# Altium PCB PCB_RX.PcbDoc
Units mm, origin at the board's own origin, x right, y up, seen from the top; angles counter-clockwise.
Board outline 85 x 54.6 mm, 2 copper layers (Top Layer, Bottom Layer); 111 components, 60 nets, 347 pads, 141 vias.
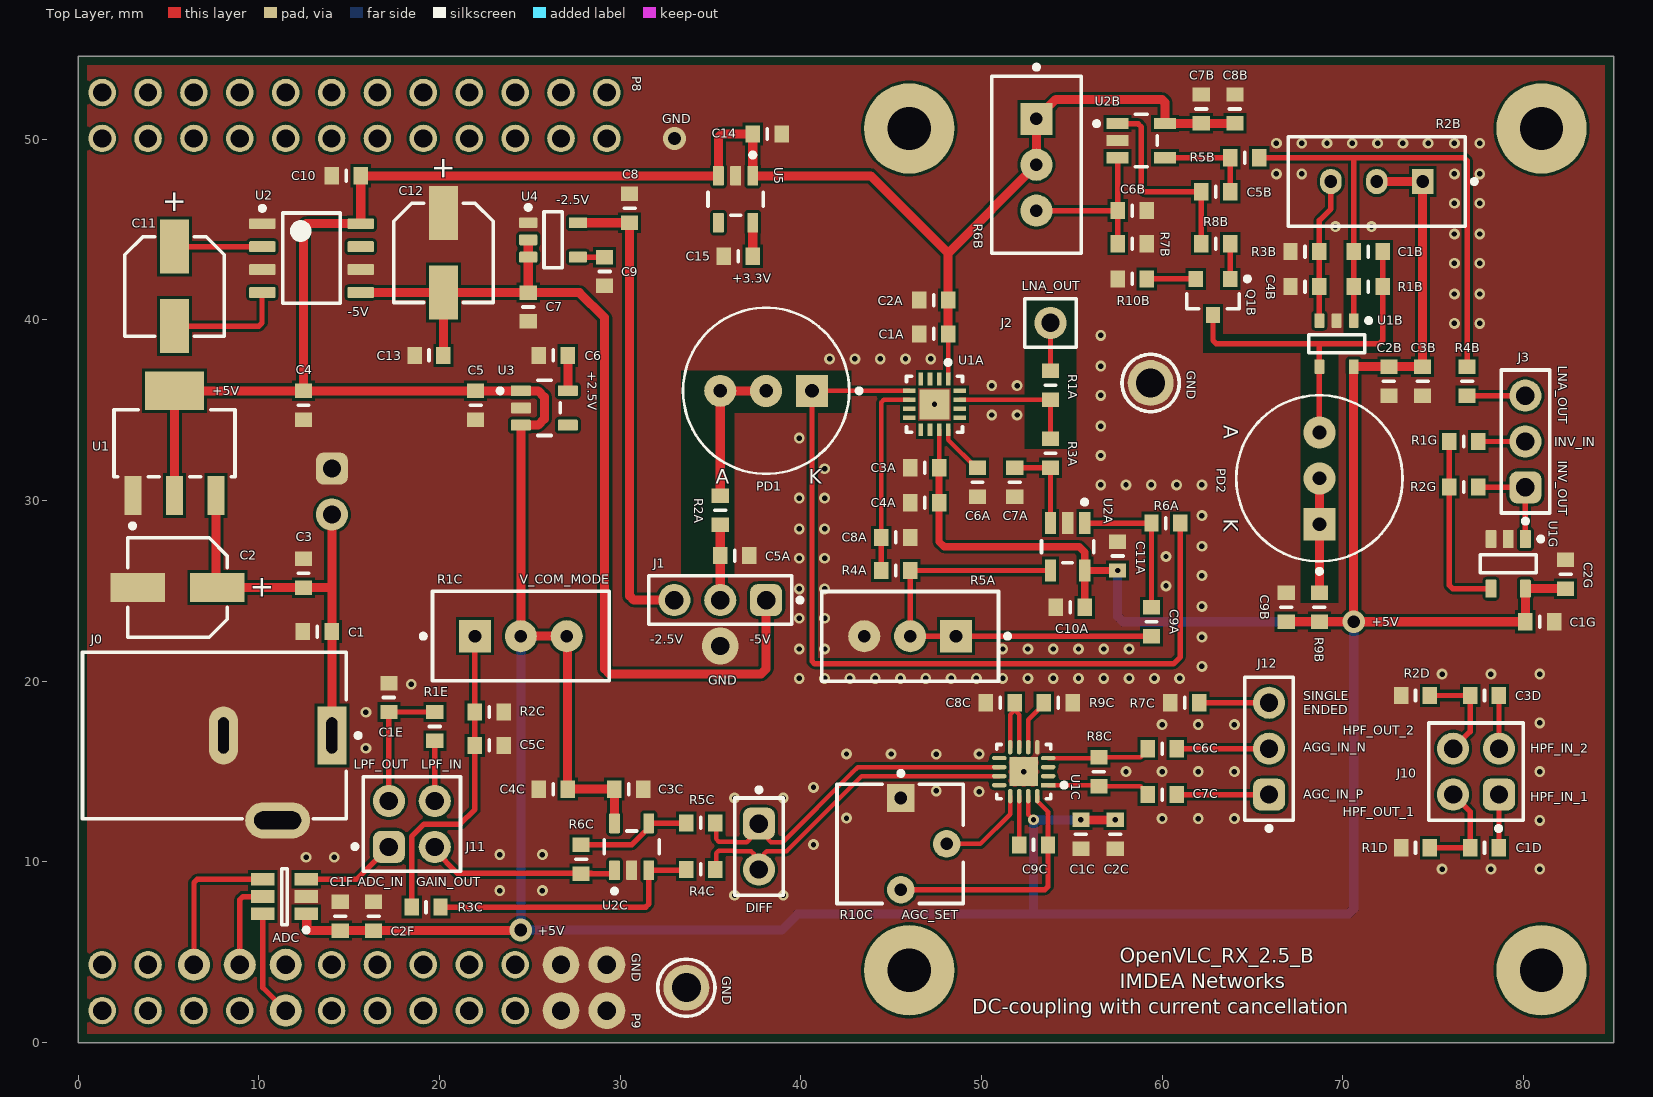
[diagram p0: Top Layer view]
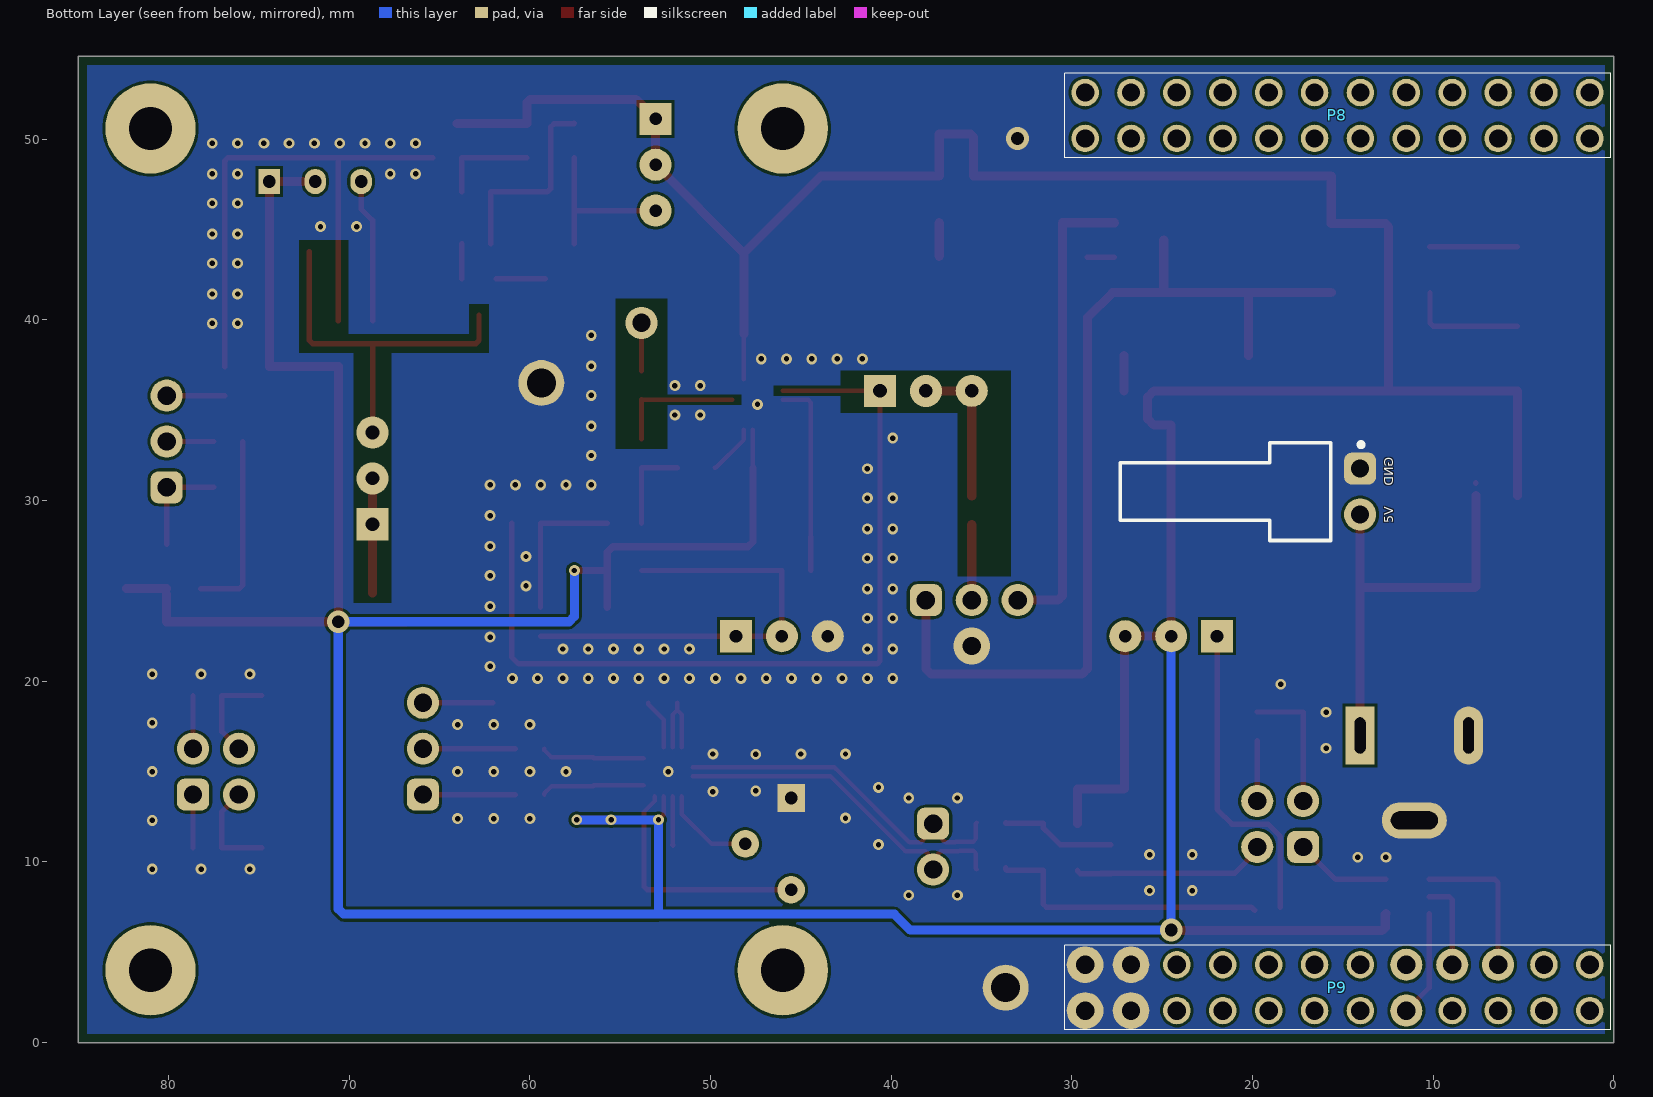
[diagram p1: Bottom Layer view, seen from below]

## Layer stack, top to bottom
Top Solder: solder mask 0.0102, Solder Resist, Dk 3.5
Top Layer: signal copper 0.0356
Dielectric1: dielectric 0.32, FR-4, Dk 4.8
Bottom Layer: signal copper 0.0356
Bottom Solder: solder mask 0.0102, Solder Resist, Dk 3.5

## Board outline
0,0 85,0 85,54.6 0,54.6

## Design rules (kind name [scope] priority, off if disabled: settings)
Clearance Clearance_1 [(InNet('GND') AND InComponent('DC-DC'))] p1: gap=0.5 ignorepadtopadclearanceinfootprint=FALSE except(0: Arc-Hole Track-Hole SMDPad-Hole THPad-Hole Via-Hole Fill-Hole Poly-Hole Region-Hole Text-Hole)
Clearance [All] p2: gap=0.15 ignorepadtopadclearanceinfootprint=FALSE except(0: Arc-Hole Track-Hole SMDPad-Hole THPad-Hole Via-Hole Fill-Hole Poly-Hole Region-Hole Text-Hole)
DiffPairsRouting [All] p1: maxlimit=0.3 minlimit=0.25 mostfreqgap=0.3 toplayer_prefgap=0.25 toplayer_minwidth=0.15 toplayer_maxwidth=0.381 toplayer_prefwidth=0.381 bottomlayer_minwidth=0.15 bottomlayer_maxwidth=0.381 bottomlayer_prefwidth=0.381 maxuncoupledlength=12.7
HoleSize [All] p1: absolutevalues=TRUE maxlimit=2.54 minlimit=0.25 maxpercent=80.000 minpercent=20.000
MinimumSolderMaskSliver [All] p1: minsoldermaskwidth=0.15
PlaneConnect [All] p1: planeconnectstyle=Direct reliefexpansion=0.508 reliefentries=4 reliefconductorwidth=0.254 reliefairgap=0.254
PolygonConnect PolygonConnect_1 [IsVia & InNet('GND')] p1: connectstyle=Direct reliefconductorwidth=0.254 reliefentries=4 polygonreliefangle="90 Angle" airgapwidth=0
PolygonConnect [All] p2: connectstyle=Direct reliefconductorwidth=0.254 reliefentries=4 polygonreliefangle="90 Angle" airgapwidth=0.254
RoutingVias [All] p1: holewidth=0.711 width=1.27 viastyle="Through Hole" minholewidth=25 minwidth=0.55 maxholewidth=0.711 maxwidth=1.27
SMDNeckDown [All] p1: percent=80.000
SilkToSilkClearance [All] p1: silktosilkclearance=0.15
SilkToSolderMaskClearance [IsPad] p1: minsilkscreentomaskgap=0.15 clearancetoexposedcopper=TRUE
SolderMaskExpansion [All] p1: expansion=0.102 istentingtop=FALSE
SupplyNets "Schematic Supply Nets_2" [InNet('+3.3V')] p1: voltage=0.000
SupplyNets "Schematic Supply Nets_6" [InNet('-5V')] p2: voltage=0.000
SupplyNets "Schematic Supply Nets_5" [InNet('-2.5V')] p3: voltage=0.000
SupplyNets "Schematic Supply Nets_4" [InNet('+2.5V')] p4: voltage=0.000
SupplyNets "Schematic Supply Nets_3" [InNet('+5V')] p5: voltage=0.000
SupplyNets "Schematic Supply Nets_1" [InNet('VCC')] p6: voltage=0.000
SupplyNets "Schematic Supply Nets" [InNet('GND')] p7: voltage=0.000
Width [All] p1: maxlimit=1 minlimit=0.15 preferedwidth=0.3 minimp=50.000000 maximp=50.000000 favimp=50.000000
24 further rules are at their usual default settings.

## Classes and differential pairs
differential pair OUT2: +OUT2_P -OUT2_N

## Components (designator, comment, footprint, x,y, rotation, side; value= is the part's Value field where it differs from the comment)
5V "61900211021" 61900211021 -1248.51,-1239.5 r270 bottom
ADC "ADS7886SBDBVR" TI-DBV6_M 11.42,8.083 r180 top
C1 "Cap" RESC1608X55N 13.24,22.752 r180 top value=10uF
C1A "Cap" RESC1608X55N 47.35,39.228 r180 top value=100nF
C1B "Cap" RESC1608X55N 71.405,43.782 r180 top value=0.2pF
C1C "Cap" RESC1608X55N 55.5,11.533 r270 top value=100nF
C1D "Cap" RESC1608X55N 77.844,10.785 r180 top value=120nF
C1E "Cap" RESC1608X55N 17.198,19.1 r90 top value=620pF
C1F "Cap" RESC1608X55N 14.509,7.003 r90 top value=100nF
C1G "Cap" RESC1608X55N 80.906,23.295 r0 top value=100nF
C2 "47uF" WCAP-PSLP_D5H5.5 5.5,25.187 r0 top
C2A "Cap" RESC1608X55N 47.35,41.101 r180 top value=2.2uF
C2B "Cap" RESC1608X55N 72.548,36.614 r270 top value=100nF
C2C "Cap" RESC1608X55N 57.4,11.533 r270 top value=2.2uF
C2F "Cap" RESC1608X55N 16.354,7.003 r90 top value=2.2uF
C2G "Cap" RESC1608X55N 82.332,25.925 r90 top value=2.2uF
C3 "Cap" RESC1608X55N 12.47,25.987 r270 top value=2.2uF
C3A "Cap" RESC1608X55N 46.85,31.819 r180 top value=100nF
C3B "Cap" RESC1608X55N 74.418,36.614 r270 top value=2.2uF
C3C "Cap" RESC1608X55N 30.48,14.026 r0 top value=100nF
C3D "Cap" RESC1608X55N 77.844,19.213 r180 top value=120nF
C4 "Cap" RESC1608X55N 12.47,35.279 r90 top value=10uF
C4A "Cap" RESC1608X55N 46.85,29.883 r180 top value=2.2uF
C4B "Cap" RESC1608X55N 67.905,41.845 r0 top value=4.7uF
C4C "Cap" RESC1608X55N 26.305,14.026 r180 top value=2.2uF
C5 "Cap" RESC1608X55N 22,35.279 r90 top value=2.2uF
C5A "Cap" RESC1608X55N 36.34,26.956 r180 top value=100nF
C5B "Cap" RESC1608X55N 62.965,47.096 r0 top value=2.2uF
C5C "Cap" RESC1608X55N 22.76,16.448 r180 top value=2.2uF
C6 "Cap" RESC1608X55N 26.305,38.041 r0 top value=10uF
C6A "Cap" RESC1608X55N 49.778,31.019 r270 top value=2.2uF
C6B "Cap" RESC1608X55N 58.338,46.052 r180 top value=4.7uF
C6C "Cap" RESC1608X55N 60,16.269 r180 top value=120nF
C7 "Cap" RESC1608X55N 24.911,40.719 r90 top value=2.2uF
C7A "Cap" RESC1608X55N 51.839,31.019 r270 top value=220pF
C7B "Cap" RESC1608X55N 62.165,51.68 r90 top value=100nF
C7C "Cap" RESC1608X55N 60,13.729 r180 top value=120nF
C8 "Cap" RESC1608X55N 30.52,46.182 r270 top value=10uF
C8A "Cap" RESC1608X55N 45.25,27.965 r180 top value=100nF
C8B "Cap" RESC1608X55N 64.027,51.68 r90 top value=2.2uF
C8C "Cap" RESC1608X55N 51.039,18.809 r0 top value=2.2uF
C9 "Cap" RESC1608X55N 29.141,42.682 r90 top value=100nF
C9A "Cap" RESC1608X55N 59.41,23.295 r270 top value=220pF
C9B "Cap" RESC1608X55N 66.866,24.095 r270 top value=100nF
C9C "Cap" RESC1608X55N 52.882,10.939 r0 top value=2.2uF
C10 "Cap" RESC1608X55N 14.84,47.982 r0 top value=2.2uF
C10A "Cap" RESC1608X55N 54.919,24.095 r180 top value=100nF
C11 "47uF" WCAP-PSLP_D5H5.5 5.332,41.859 r90 top
C11A "Cap" RESC1608X55N 57.538,26.933 r90 top value=2.2uF
C12 "47uF" WCAP-PSLP_D5H5.5 20.217,43.719 r90 top
C13 "Cap" RESC1608X55N 19.417,38.041 r0 top value=10uF
C14 "GRM188R6YA475KE15D" RESC1608X55N 38.139,50.294 r180 top value=2.2uF
C15 "GRM188R6YA106MA73D" RESC1608X55N 36.539,43.527 r0 top value=10uF
DIFF "61300211121" 61300211121 37.679,10.849 r270 top
GND "5011" KSTN-5011_V 59.362,36.511 r270 top
GND "5011" KSTN-5011_V 33.662,3.041 r270 top
J0 "PJ-102A" FP-PJ-102A-MFG 7.54,17 r90 top
J1 "61300311121" 61300311121 35.54,24.494 r180 top
J2 "61300111121" 61300111121 53.819,39.837 r0 top
J3 "61300311121" 61300311121 80.106,33.272 r90 top
J10 "61300421121" 61300421121 77.374,14.999 r90 top
J11 "61300421121" 61300421121 18.468,12.1 r0 top
J12 "61300311121" 61300311121 65.918,16.269 r90 top
P8 "61302421121" BBB_CAPE_NO_HEADER_R_24#1 57.204,50.049 r0 bottom
P9 "61302421121" BBB_CAPE_NO_HEADER_R_24#2 57.205,1.771 r0 bottom
PD1 "BPW21R" FP-6_511-5002_01-4-MFG 38.08,36.079 r0 top
PD2 "BPW21R" FP-6_511-5002_01-4-MFG 68.705,31.233 r270 top
Q1B "NESG340033" ONSC-SOT-23-3-318-08_V 62.815,41.274 r270 top
R1A "Res1" RESC1608X55N 53.819,36.379 r270 top value=130
R1B "Res1" RESC1608X55N 71.405,41.845 r0 top value=390k
R1C "500" FP-3296W-MFG#1 24.5,22.5 r270 top
R1D "Res1" RESC1608X55N 74.024,10.785 r180 top value=130
R1E "Res1" RESC1608X55N 19.738,17.5 r270 top value=130
R1G "Res1" RESC1608X55N 76.696,33.272 r180 top value=130
R2A "Res1" RESC1608X55N 35.54,29.465 r270 top value=2k
R2B "20k" FP-3296W-MFG#2 71.878,47.658 r90 top
R2C "Res1" RESC1608X55N 22.76,18.3 r0 top value=470
R2D "Res1" RESC1608X55N 74.024,19.213 r180 top value=130
R2G "Res1" RESC1608X55N 76.696,30.755 r0 top value=130
R3A "Res1" RESC1608X55N 53.819,32.619 r270 top value=68.1
R3B "Res1" RESC1608X55N 67.905,43.782 r180 top value=470
R3C "Res1" RESC1608X55N 19.254,7.5 r180 top value=130
R4A "Res1" RESC1608X55N 45.25,26.133 r180 top value=34k
R4B "Res1" RESC1608X55N 76.881,36.614 r90 top value=130
R4C "Res1" RESC1608X55N 34.462,9.587 r0 top value=130
R5A "100k" FP-3296W-MFG#1 46.05,22.49 r90 top
R5B "Res1" RESC1608X55N 64.565,48.98 r180 top value=1M
R5C "Res1" RESC1608X55N 34.462,12.163 r0 top value=130
R6A "Res1" RESC1608X55N 60.21,28.753 r0 top value=20k
R6B "20k" FP-3296W-MFG#1 53.045,48.592 r180 top
R6C "Res1" RESC1608X55N 27.838,10.155 r90 top value=130
R7B "Res1" RESC1608X55N 58.338,44.223 r0 top value=470
R7C "Res1" RESC1608X55N 61.247,18.809 r180 top value=130
R8B "Res1" RESC1608X55N 62.965,44.223 r180 top value=100
R8C "Res1" RESC1608X55N 56.5,14.999 r270 top value=130
R9B "Res1" RESC1608X55N 68.705,24.095 r90 top value=2k
R9C "Res1" RESC1608X55N 54.251,18.809 r180 top value=10k
R10B "Res1" RESC1608X55N 58.338,42.274 r180 top value=100
R10C "10k" BOUR-3362P 45.5,11 r270 top
U1 "TLV76150DCYR" FP-DCY0004A-MFG 5.332,33.179 r90 top
U1A "LTC6560IUD#PBF" FP-UD-16-05-08-1700-MFG 47.4,35.329 r270 top
U1B "LMH6629MFE/NOPB" DBV0005A_L 69.655,38.689 r270 top
U1C "AD8338ACPZ-R7" FP-CP-16-22-IPC_C 52.339,14.999 r180 top
U1G "OPA820IDBVR" DBV0005A_N 79.156,26.5 r270 top
U2 "LM2663M/NOPB" D0008A_N 12.915,43.424 r0 top
U2A "LT6015IS5#TRMPBF" FP-S5-5-05-08-1635-MFG 54.769,27.443 r270 top
U2B "LT6015IS5#TRMPBF" FP-S5-5-05-08-1635-MFG 58.848,49.93 r0 top
U2C "OPA863ADBVR" FP-DBV0005A-MFG 30.635,10.837 r90 top
U3 "TPS7A2425DBVR" FP-DBV0005A-MFG 25.805,35.129 r0 top
U4 "TPS72325DBVR" DBV0005A_N 26.286,44.432 r0 top
U5 "TPS7A2433DBVR" FP-DBV0005A-MFG 36.389,46.682 r270 top

## Footprints (in the part's own frame and the unit in brackets; to place one, negate y for a bottom-side part, rotate by r counter-clockwise, add the part's x,y. Pads: shape width x height; smd on the part's side, far side on the other; paste and mask are expansions set on the pad)
61300111121 [mil] "Pin Header, pitch 2.54 mm, THT, Vertical, single row, 1p"
  round 70 hole 40: 1(0,0)
  silkscreen extent -56,-53 56,53, body extent -50,-50 50,50, height 337
61300211121 [mil] "Pin Header, pitch 2.54 mm, THT, Vertical, single row, 2p"
  rrect50% 70x70 hole 40: 1(-50,0)
  round 70 hole 40: 2(50,0)
  silkscreen extent -129,-53 106,53, body extent -100,-50 100,50, height 337
61300311121 [mil] "Pin Header, pitch 2.54 mm, THT, Vertical, single row, 3p"
  rrect50% 70x70 hole 40: 1(-100,0)
  round 70 hole 40: 2(0,0) 3(100,0)
  silkscreen extent -179,-53 156,53, body extent -150,-50 150,50, height 337
61300421121 [mil] "Pin Header, pitch 2.54 mm, THT, Vertical, dual row, 4p"
  rrect50% 70x70 hole 40: 1(-50,-50)
  round 70 hole 40: 2(-50,50) 3(50,-50) 4(50,50)
  silkscreen extent -129,-103 106,103, body extent -100,-100 100,100, height 338
61900211021 [mm] "2.54mm Male Left Angled Header Bottom Locking, 2p"
  rrect50% 1.778x1.778 hole 1: 1(-1271.27,-1262.55)
  round 1.778 hole 1: 2(-1268.73,-1262.55)
  silkscreen extent -1272.72,-1275.82 -1267.29,-1262.38, body extent -1272.54,-1275.75 -1267.46,-1262.23, height 5.83
BBB_CAPE_NO_HEADER_R_24#1 [mil] "46-pin male header for BeagleBone Black P8,P9"
  round 60 hole 40: 23(-1100,0) 24(-1100,-100) 25(-1200,0) 26(-1200,-100) 27(-1300,0) 28(-1300,-100) 29(-1400,0) 30(-1400,-100) 31(-1500,0) 32(-1500,-100) 33(-1600,0) 34(-1600,-100) 35(-1700,0) 36(-1700,-100) 37(-1800,0) 38(-1800,-100) 39(-1900,0) 40(-1900,-100) 41(-2000,0) 42(-2000,-100) 43(-2100,0) 44(-2100,-100) 45(-2200,0) 46(-2200,-100)
  silkscreen extent -2246,-142 -1056,42
BBB_CAPE_NO_HEADER_R_24#2 [mil] "46-pin male header for BeagleBone Black P8,P9"
  round 80 hole 40: 23(-1100,0) 24(-1100,-100) 25(-1200,0) 26(-1200,-100)
  round 60 hole 40: 27(-1300,0) 28(-1300,-100) 29(-1400,0) 30(-1400,-100) 31(-1500,0) 32(-1500,-100) 33(-1600,0) 34(-1600,-100) 35(-1700,0) 36(-1700,-100) 39(-1900,0) 41(-2000,0) 43(-2100,0) 44(-2100,-100) 45(-2200,0) 46(-2200,-100)
  round 70 hole 40: 37(-1800,0) 38(-1800,-100) 40(-1900,-100) 42(-2000,-100)
  silkscreen extent -2246,-142 -1056,42
BOUR-3362P [mm] "THD, 3-Leads, Body 6.6x6.99mm, Pitch 2.54mm"
  rect 1.524x1.524 hole 0.7 paste-2539.97 mask+0: 1(-2.54,0.035)
  round 1.524 hole 0.7 paste-2539.97 mask+0: 2(0,2.575) 3(2.54,0.035)
  silkscreen extent -4.02,-3.49 3.3,3.5, body extent -3.3,-3.49 3.3,3.49, height 4.95
D0008A_N [mm] "SOIC, 8-Leads, Body 5x4mm, Pitch 1.27mm, IPC Medium Density"
  rrect17% 1.45x0.6 smd: 1(-2.725,1.905) 2(-2.725,0.635) 3(-2.725,-0.635) 4(-2.725,-1.905) 5(2.725,-1.905) 6(2.725,-0.635) 7(2.725,0.635) 8(2.725,1.905)
  silkscreen extent -2.85,-2.5 1.6,2.88, body extent -3,-2.45 3,2.45, height 1.63
DBV0005A_L [mm] "SOT23, 5-Leads, Body 3.05x1.75mm, Pitch 0.95mm, IPC High Density"
  rrect18% 0.8x0.55 smd: 1(-1.275,0.95) 2(-1.275,0) 3(-1.275,-0.95) 4(1.275,-0.95) 5(1.275,0.95)
  silkscreen extent -1.4,-1.55 0.5,1.9, body extent -1.42,-1.46 1.42,1.46, height 1.08
DBV0005A_N [mm] "SOT23, 5-Leads, Body 3.05x1.75mm, Pitch 0.95mm, IPC Medium Density"
  rrect17% 1x0.6 smd: 1(-1.375,0.95) 2(-1.375,0) 3(-1.375,-0.95) 4(1.375,-0.95) 5(1.375,0.95)
  silkscreen extent -1.5,-1.55 0.5,1.93, body extent -1.42,-1.46 1.42,1.46, height 1.08
FP-6_511-5002_01-4-MFG [mil]
  rect 70x70 hole 30 paste-99999 mask+0: 1(100,0)
  round 70 hole 30 paste-99999 mask+0: 2(-100,0)
  silkscreen extent -181,-181 208,181, body extent -185,-185 185,185, height 10
FP-3296W-MFG#1 [mm]
  rect 1.778x1.778 hole 0.7 paste-2539.97 mask+0: 1(0.005,-2.54)
  round 1.778 hole 0.7 paste-2539.97 mask+0: 2(0.005,0) 3(0.005,2.54)
  silkscreen extent -2.48,-5.52 2.48,4.89, body extent -2.58,-4.99 2.58,4.99, height 0.25
FP-3296W-MFG#2 [mm]
  rect 1.397x1.2 hole 0.7 paste-2539.97 mask+0: 1(0.005,-2.54)
  oval 1.397x1.2 hole 0.7 paste-2539.97 mask+0: 2(0.005,0) 3(0.005,2.54)
  silkscreen extent -2.48,-5.53 2.48,4.89, body extent -2.58,-4.99 2.58,4.99, height 0.25
FP-CP-16-22-IPC_C [mm]
  rect 0.806x0.239 smd paste+0 mask+0: 1(-1.353,0.75)
  rrect100% 0.806x0.239 smd paste+0 mask+0: 2(-1.353,0.25) 3(-1.353,-0.25) 4(-1.353,-0.75) 9(1.353,-0.75) 10(1.353,-0.25) 11(1.353,0.25) 12(1.353,0.75)
  rrect100% 0.239x0.806 smd paste+0 mask+0: 5(-0.75,-1.353) 6(-0.25,-1.353) 7(0.25,-1.353) 8(0.75,-1.353) 13(0.75,1.353) 14(0.25,1.353) 15(-0.25,1.353) 16(-0.75,1.353)
  rect 1.6x1.6 smd paste-1000 mask+0: 17(0,0)
  silkscreen extent -2.36,-1.5 1.5,1.5, body extent -1.86,-1.86 1.86,1.86, height 0.25
FP-DBV0005A-MFG [mm]
  rrect17% 1.1x0.6 smd paste+0 mask+0: 1(-1.3,0.95) 2(-1.3,0) 3(-1.3,-0.95) 4(1.3,-0.95) 5(1.3,0.95)
  silkscreen extent -2.57,-1.53 0.87,1.53, body extent -1.95,-1.78 1.95,1.78, height 0.25
FP-DCY0004A-MFG [mm]
  rect 2.15x0.95 smd paste+0 mask+0: 1(-2.9,2.3) 2(-2.9,0) 3(-2.9,-2.3)
  rect 2.15x3.25 smd paste+0 mask+0: 4(2.9,0)
  silkscreen extent -4.7,-3.35 1.85,3.35, body extent -4.08,-3.45 4.08,3.45, height 0.25
FP-PJ-102A-MFG [mm]
  rect 3.2x1.6 hole 0.6 slot 2 at 0 deg paste-2539.97 mask+0: 1(0,-6.5)
  rrect100% 3.2x1.6 hole 0.6 slot 2 at 0 deg paste-2539.97 mask+0: 2(0,-0.5)
  rrect100% 2x3.6 hole 2.6 slot 1 at 0 deg paste-2539.97 mask+0: 3(-4.7,-3.5)
  silkscreen extent -4.6,-8.08 4.6,7.3, body extent -5.6,-7.4 4.7,7.4, height 0.25
FP-S5-5-05-08-1635-MFG [mm]
  rect 1.22x0.62 smd paste+0 mask+0: 1(-1.31,0.95) 2(-1.31,0) 3(-1.31,-0.95) 4(1.31,-0.95) 5(1.31,0.95)
  silkscreen extent -2.6,-1.45 0.87,1.45, body extent -2.02,-1.68 2.02,1.68, height 0.25
FP-UD-16-05-08-1700-MFG [mm]
  rect 0.7x0.25 smd paste+0 mask+0: 1(-1.4,0.75) 2(-1.4,0.25) 3(-1.4,-0.25) 4(-1.4,-0.75) 9(1.4,-0.75) 10(1.4,-0.25) 11(1.4,0.25) 12(1.4,0.75)
  rect 0.25x0.7 smd paste+0 mask+0: 5(-0.75,-1.4) 6(-0.25,-1.4) 7(0.25,-1.4) 8(0.75,-1.4) 13(0.75,1.4) 14(0.25,1.4) 15(-0.25,1.4) 16(-0.75,1.4)
  rect 1.65x1.65 smd paste+0 mask+0: 17(0,0)
  silkscreen extent -2.45,-1.55 1.55,1.55, body extent -1.85,-1.85 1.85,1.85, height 0.25
KSTN-5011_V [mm] "Test Point, Dia 3.17mm"
  round 2.54 hole 1.6: 1(0,0)
  silkscreen extent -1.58,-1.59 1.58,1.59, body extent -1.59,-1.59 1.59,1.59, height 8.13
ONSC-SOT-23-3-318-08_V [mm] "SOT23, 3-Leads, Body 2.92x1.3mm, Pitch 0.95mm"
  rect 0.9x0.8 smd: 1(-1,0.95) 2(-1,-0.95) 3(1,0)
  silkscreen extent -1.12,-1.46 0.65,2.03, body extent -0.65,-1.46 0.65,1.46, height 1.11
RESC1608X55N [mm]
  rect 0.8x0.95 smd: 1(-0.8,0) 2(0.8,0)
  silkscreen extent 0,-0.3 0,0.3
TI-DBV6_M [mm] "SOT23, 6-Leads, Body 2.9x1.6mm, Pitch 0.95mm, IPC Low Density"
  rect 1.3x0.7 smd: 1(-1.2,0.95) 2(-1.2,0) 3(-1.2,-0.95) 4(1.2,-0.95) 5(1.2,0) 6(1.2,0.95)
  silkscreen extent -1.33,-1.55 0.15,1.97, body extent -0.87,-1.52 0.87,1.53, height 1.45
WCAP-PSLP_D5H5.5 [mm] "Aluminum Polymer Capacitors, body diameter 5mm"
  rect 3x1.6 smd: 1(2.2,0) 2(-2.2,0)
  silkscreen extent -2.75,-2.75 2.75,2.75, body extent -3,-2.65 3,2.65, height 5.5

## Part data
5V: library part CMP-1502-00592-2, Color=Beige, Contact Resistance=20mΩ, Current Rating=3A, Flammability Rating="UL94 V-0", Insulation Resistance=1GΩ, Max Operating Temperature=105°C, Min Operating Temperature=-40°C, Operating Supply Voltage=250V, Connector Type="Male Pin", Contact Gender=Male, Contact Material=Copper, Contact Mating Length=7.62mm, Contact Plating=Tin, Fastening Type=Friction, Gender=Male, Height=3.2mm, Housing Material=Nylon, Insulation=Insulated, Lead Pitch=2.54mm, Length=5.08mm, Mount="Through Hole", NexarPartId=18818217, Number of Contacts=2, Number of Pins=2, Number of Positions=2, Number of Rows=1, Packaging=Bulk, Pitch=2.54mm, REACH SVHC=Unknown, RoHS=Compliant, Termination="Through Hole", Voltage Rating=250V, Width=5.12mm
ADC: library part CMP-0003-00246-2, "2.35 to 5.25 V, 12-Bit, 1 MSPS, Serial ADC, -40 to 125 degC, 6-pin SOT23 (DBV6), Green (RoHS & no Sb/Br)", Analog Voltage AV/DD(Max)(V)=5.25, Analog Voltage AV/DD(Min)(V)=2.35, Manufacturer="Texas Instruments", # Input Channels=1, Architecture=SAR, Code_JEDEC=MO-178, ComponentLink1Description="Manufacturer URL", ComponentLink1URL=http://www.ti.com/, ComponentLink2Description=Datasheet, ComponentLink2URL=http://www.ti.com/general/docs/lit/getliterature.tsp?genericPartNumber=ADS7886&fileType=pdf, ComponentLink3Description="Package Specification", ComponentLink3URL=http://www.ti.com/litv/pdf/mpds026h, DatasheetVersion=SLAS492A, Digital Supply(Max)(V)=5.25, Digital Supply(Min)(V)=2.35, Eco-Plan="Green (RoHS & no Sb/Br)", INL(Max)(+/-LSB)=1.25, Interface="Serial SPI", Mounting Technology="Surface Mount", PackageDescription="6-Pin Plastic Small Outline, Body 1.6 x 2.9 mm, Pitch 0.95 mm", PackageReference=DBV6, PackageVersion="4073253-5/K, 03/2006", PartNumber=ADS7886SBDBVR, Resolution(Bits)=12, Sample Rate (max)(SPS)=1M, SFDR(dB)=85.5, SINAD(dB)=71.25, SNR(dB)=71.25, SubFamily="Precision ADC (<=10MSPS)"
C1 C1A C1B C1C C1D C1E C1F C1G C2A C2B C2C C2F C2G C3 C3A C3B C3C C3D C4 C4A C4B C4C C5 C5A C5B C5C C6 C6A C6B C6C C7 C7A C7B C7C C8 C8A C8B C8C C9 C9A C9B C9C C10 C10A C11A C13: "Capacitor", LatestRevisionDate=17-Jul-2002, LatestRevisionNote="Re-released for DXP Platform.", PackageDescription="Radial Cap, Thru-Hole; 2 Leads; 0.3 in Pin Spacing", PackageReference=RAD-0.3, Published=8-Jun-2000, Publisher="Altium Limited"
C2 C11 C12: library part CMP-03913-53758736-1, "875105242006 WCAP-PSLP Aluminum Polymer Capacitors", Capacitance=47µF, Case/Package=Radial, ESR (Equivalent Series Resistance)=30mΩ, Leakage Current=300µA, Max Operating Temperature=105°C, Min Operating Temperature=-55°C, Ripple Current=1.97A, Tolerance=20%, Voltage Rating=10V, Diameter=5mm, Height - Seated (Max)=5.5118mm, Length=5.5mm, Life (Hours)=2000hours, Mount="Surface Mount", NexarPartId=53758736, Packaging="Tape & Reel (TR)", Pitch=5.3mm, Polarity=Polar, REACH SVHC=Unknown, RoHS=Compliant, Voltage Rating (DC)=10V
C14 C15: library part Cap, "Capacitor", LatestRevisionDate=17-Jul-2002, LatestRevisionNote="Re-released for DXP Platform.", PackageDescription="Radial Cap, Thru-Hole; 2 Leads; 0.3 in Pin Spacing", PackageReference=RAD-0.3, Published=8-Jun-2000, Publisher="Altium Limited"
DIFF: library part CMP-1712-00002-6, Color=Black, Contact Resistance=20mΩ, Current Rating=3A, Max Operating Temperature=125°C, Min Operating Temperature=-40°C, Operating Supply Voltage=250V, Connector Type="Male Pin", Contact Gender=Male, Contact Material=Copper, Contact Mating Length=5.9944mm, Contact Plating=Gold, Gender=Male, Height=8.94mm, Housing Material=PBT, Lead Free="Lead Free", Lead Pitch=2.54mm, Mount="Through Hole", NexarPartId=20081794, Number of Contacts=2, Number of Pins=2, Number of Positions=2, Number of Rows=1, Orientation=Vertical, Packaging=Bulk, Pitch=2.54mm, REACH SVHC="No SVHC", RoHS=Compliant, Termination="Through Hole", Voltage Rating=250V
GND GND: library part CMP-1672-00003-4, "Test Point, Black, Through Hole, RoHS, Bulk", Colour=Black, Manufacturer=Keystone, Package Quantity=100, ComponentLink1Description="Manufacturer URL", ComponentLink1URL=http://www.keyelco.com/, ComponentLink2Description=Datasheet, ComponentLink2URL=http://www.keyelco.com/product-pdf.cfm?p=1320, Contact Material=Bronze, Contact Plating=Silver, DatasheetVersion="Rev. F, 12/2013", Height="8.12 mm", Mount="Through Hole", Mounting Technology="Through Hole", PackageDescription="1-Pin Through Hole Device, Dia 3.17 mm", PackageReference=5011, Packaging=Bulk, Pins=1, REACH SVHC="No SVHC", RoHSCompliant=true
J0: library part CMP-12637-106234071-1, "PJ-102A 2.0 x 6.5 mm, 2.5 A, Horizontal, Through Hole, Tapered Pins, Dc Power Jack Connector", Color=Black, Current Rating=2.5A, Flammability Rating="UL94 V-0", Insulation Resistance=50MΩ, Max Operating Temperature=85°C, Min Operating Temperature=-25°C, Voltage Rating=24V, Contact Gender=Male, Contact Material="Copper, Nickel, Tin", Contact Plating=Nickel, Diameter=2.1mm, Gender=Male, Height=11.2mm, Housing Color=Black, Housing Material=Thermoplastic, Inside Diameter=2mm, Lead Free="Lead Free", Lifecycle Status=Production, Mount="Through Hole", NexarPartId=106234071, Number of Conductors=2, Number of Contacts=3, Orientation=Horizontal, Outside Diameter=6.5mm, Packaging=Bulk, RoHS=Compliant, Schedule B="8536695050, 8536695050", Shielding=No, Termination="Through Hole", Voltage Rating (DC)=24V
J1 J3 J12: library part CMP-1502-01062-3, Color=Black, Contact Resistance=20mΩ, Current Rating=3A, Max Operating Temperature=105°C, Min Operating Temperature=-40°C, Operating Supply Voltage=250V, Connector Type="Male Pin", Contact Material=Copper, Contact Mating Length=5.9944mm, Contact Plating=Gold, Gender=Male, Height=8.94mm, Lead Free="Lead Free", Lead Pitch=2.54mm, Mount="Through Hole", NexarPartId=32855521, Number of Contacts=3, Number of Pins=3, Number of Positions=3, Number of Rows=1, Orientation=Vertical, Packaging=Bulk, Pitch=2.54mm, REACH SVHC=Unknown, RoHS=Compliant, Termination=Solder, Voltage Rating=250V
J2: library part CMP-1502-01058-3, Color=Black, Contact Resistance=20mΩ, Current Rating=3A, Operating Supply Voltage=250V, Connector Type="Male Pin", Contact Material=Copper, Contact Mating Length=5.9944mm, Contact Plating=Gold, Gender=Male, Lead Pitch=2.54mm, Mount="Through Hole", NexarPartId=32855518, Number of Contacts=1, Number of Pins=1, Number of Positions=1, Number of Rows=1, Orientation=Vertical, Packaging=Bulk, REACH SVHC=Unknown, RoHS=Compliant, Termination=Solder
J10 J11: library part CMP-1502-01066-4, Color=Black, Contact Resistance=20mΩ, Current Rating=3A, Max Operating Temperature=105°C, Min Operating Temperature=-40°C, Operating Supply Voltage=250V, Connector Type="Male Pin", Contact Material=Copper, Contact Mating Length=5.9944mm, Contact Plating=Gold, Gender=Male, Height=8.89mm, Lead Free="Lead Free", Lead Pitch=2.54mm, Mount="Through Hole", NexarPartId=32855524, Number of Contacts=4, Number of Pins=4, Number of Positions=4, Number of Rows=2, Orientation=Vertical, Packaging=Bulk, Pitch=2.54mm, REACH SVHC=Unknown, RoHS=Compliant, Row Spacing=2.54mm, Termination=Solder, Voltage Rating=250V
P8: library part BBB_P8_reduced
P9: library part BBB_P9_reduced
PD1 PD2: library part CMP-2000-05428-2, "SENSOR PHOTODIODE 565NM RADIAL", Ambient Temperature Range High=+125°C, Ambient Temperature Range Low=-40°C, Dark Current=0.002uA, Forward Current=50mA, Forward Voltage=1V, Manufacturer=Vishay, Package=6.511-5002.01-4, Power Dissipation=300mW, Reverse Breakdown Voltage=10V, Temperature="-40°C to +125°C", Automotive=No, Category=Diode, ComponentLink2Description=Datasheet, ComponentLink2URL=http://www.vishay.com/docs/81519/bpw21r.pdf, Device Class L1=Sensors, Device Class L2="Optical Sensors", Device Class L3=Photodiodes, Digikey Description="SENSOR PHOTODIODE 565NM RADIAL", Height=3.3mm, Lead Free=Yes, Manufacturer Part Number=BPW21R, Max Junction Temp=+125°C, Mouser Description="Photodiodes 50 Degree 300mW", Octopart=https://octopart.com/bpw21r-vishay-39390634, Response Time=3.1us, RoHS=TRUE, Sensor Output=Photodiode, Temperature Range High=+125°C, Temperature Range Low=-40°C, Viewing Angle=100°, Wavelength=565nm
Q1B: library part CMP-0722-00001-2, "General Purpose Transistor, NPN Silicon, 3-Pin SOT-23, Pb-Free, Tape and Reel", Manufacturer="On Semiconductor", PartNumber=MMBT2222LT1G, ComponentLink1Description="Manufacturer URL", ComponentLink1URL=http://www.onsemi.com/, ComponentLink2Description=Datasheet, ComponentLink2URL=http://www.onsemi.cn/pub_link/Collateral/MMBT2222LT1-D.PDF, ComponentLink3Description="Package Specification", ComponentLink3URL=http://www.onsemi.cn/pub_link/Collateral/318-08.PDF, DatasheetVersion="Rev. 10", fT Min (MHz)=250, IC Continuous (A)=0.6, Mounting Technology="Surface Mount", PackageDescription="3-Pin Small Outline Transistor, Body 2.92 x 1.3 mm, Pitch 0.95 mm", PackageReference=SOT-23-3-318-08, PackageVersion="Rev. AP, 11/2009", Packing="Tape and Reel", Polarity=NPN, RoHS=TRUE
R1A R1B R1D R1E R1G R2A R2C R2D R2G R3A R3B R3C R4A R4B R4C R5B R5C R6A R6C R7B R7C R8B R8C R9B R9C R10B: "Resistor", LatestRevisionDate=17-Jul-2002, LatestRevisionNote="Re-released for DXP Platform.", PackageDescription="Axial Device, Thru-Hole; 2 Leads; 0.3 in Pin Spacing", PackageReference=AXIAL-0.3, Published=8-Jun-2000, Publisher="Altium Limited"
R1C R2B R5A R6B: library part CMP-1747-00001-8, "TRIMMER 10K OHM 0.5W PC PIN TOP", Color=Blue, Insulation Resistance=1GR, Max Operating Temperature=125°C, Max Power Dissipation=500mW, Min Operating Temperature=-55°C, Package Quantity=50, Resistance=10kR, Resistance Tolerance=10%, Resistor Type=Cermet, Temperature Coefficient=100ppm/°C, Contact Plating=Tin, Depth=4.83mm, Height=11.55mm, Lead Free="Lead Free", Length=9.53mm, Military Standard=Not, Mount="Through Hole", Number of Turns=25, Packaging=Rail/Tube, Power Rating=500mW, Radiation Hardening=No, Reach SVHC Compliant=Yes, RoHS Compliant=Yes, Series=3296, Taper=Linear, Technology=CERMET, Termination=Pin, Tolerance=10%, Weight=0.03oz, Width=9.53mm
R10C: library part CMP-1747-00004-1, "Square Trimpot(R) Trimming Potentiometer, 10 KOhm, 300 V, -55 to 125 degC, 3-Pin THD, RoHS, Tube", Case Code (Imperial)=0612, Case Code (Metric)=1632, Case/Package=1206, Max Operating Temperature=125degC, Min Operating Temperature=-25degC, Package Quantity=5000, Power Rating="1 W", Resistance="50 mohm", Tolerance=1%, Voltage Rating="220 mV", ComponentLink1Description="Manufacturer URL", ComponentLink1URL=http://www.bourns.com/, ComponentLink2Description=Datasheet, ComponentLink2URL=http://www.bourns.com/docs/Product-Datasheets/3362.pdf, DatasheetVersion=May-16, Height="0.6 mm", Length="3.2 mm", Mount="Surface Mount", PackageDescription="3-Pin Through Hole Device, Body 6.6 x 6.99 mm, Pitch 2.54 mm", PackageReference=3326P, Packaging="Tape and Reel", Pins=2, REACH SVHC="No SVHC", RoHSCompliant=True, Width="1.6 mm"
U1: library part CMP-00370-134324849-1, "TLV76150DCYR 1-A 16-V high-PSRR linear voltage regulator 4-SOT-223 -40 to 125", Case/Package=SOT-223, Dropout Voltage=900mV, Manufacturer Lifecycle Status=ACTIVE, Max Junction Temperature (Tj)=125°C, Max Supply Voltage=16V, Min Operating Temperature=-40°C, Min Supply Voltage=6.5V, Nominal Supply Current=65µA, Output Current=1A, Output Voltage=5V, Accuracy=1%, Height=1.8mm, Length=6.5mm, Lifecycle Status=Production, Max Operating Temperature=125°C, NexarPartId=134324849, Number of Channels=1, Number of Outputs=1, Number of Pins=4, Thickness=1.6mm, Width=3.5mm
U1A: library part CMP-09114-000035-1, "IC TRANSIMPEDANCE AMP 16QFN", RoHS Compliant=Yes
U1B: library part CMP-0055-01619-3, "Ultra-Low Noise, High-Speed Operational Amplifier with Shutdown, 5-pin SOT-23, 250 Reel", Manufacturer="Texas Instruments", Package Reference=DBV0005A, PackageTopMarking=AE7A*XTT, PowerWise=Y, ComponentLink1Description="Datasheet URL", ComponentLink1URL=http://www.ti.com/general/docs/lit/getliterature.tsp?genericPartNumber=LMH6629&fileType=pdf, CompType=Amplifiers, High-Reliability=Y, PackageDescription="Molded SOT-23, .115 x .063 x .040 in Body, 5 Lead, .0375 in Pitch", PartNumber=LMH6629MFE/NOPB, PinCount=5, RoHS=Y
U1C: library part CMP-09116-000032-1, "IC OPAMP VGA 1 CIRCUIT 16LFCSP", Manufacturer="Analog Devices", Max Junction Temp=+150°C, Max Supply Voltage=5V, Min Supply Voltage=3V, Nominal Supply Current=3-6mA, Output Current per Channel=5mA, Package=CP-16-22, Temperature="-40°C to +85°C", Temperature Range High=+85°C, Temperature Range Low=-40°C, Voltage Gain=80dB, Automotive=No, Bandwidth=18MHz, Category=IC, ComponentLink2Description=Datasheet, ComponentLink2URL=https://www.analog.com/media/en/technical-documentation/data-sheets/AD8338.pdf, Device Class L1="Integrated Circuits (ICs)", Device Class L2="Linear ICs", Device Class L3="Amplifiers - Op Amps", Digikey Description="IC OPAMP VGA 1 CIRCUIT 16LFCSP", Height=0.8mm, Ipc Land Pattern Name=QFN50P300X300X75-16, Lead Free=Yes, Manufacturer Part Number=AD8338ACPZ-R7, Mouser Description="Special Purpose Amplifiers Ultra Low Pwr 18MHz SGL CH VGA", Number of Channels=1, Octopart=https://octopart.com/ad8338acpz-r7-analog+devices-21054770, RoHS=TRUE
U1G: library part CMP-0018-00428-2, "Unity Gain Stable, Low Noise, Voltage Feedback Operational Amplifier, 5 to 12 V, -40 to 85 degC, 5-pin SOT23 (DBV5), Green (RoHS & no Sb/Br)", Manufacturer="Texas Instruments", 2nd Harmonic(dBc)=90, 3rd Harmonic(dBc)=110, @ MHz=1, Acl, min stable gain(V/V)=1, BW @ Acl(MHz)=700, Code_JEDEC=MO-178, ComponentLink1Description="Manufacturer URL", ComponentLink1URL=http://www.ti.com/, ComponentLink2Description=Datasheet, ComponentLink2URL=http://www.ti.com/general/docs/lit/getliterature.tsp?genericPartNumber=OPA820&fileType=pdf, ComponentLink3Description="Package Specification", ComponentLink3URL=http://www.ti.com/litv/pdf/mpds018i, DatasheetVersion=SBOS303C, Diff Gain(%)=0.01, Diff Phase(deg)=0.03, Eco-Plan="Green (RoHS & no Sb/Br)", Iib(Max)(nA)=2300, Io(Typ)(mA)=110, Iq per channel(Max)(mA)=6.4, Mounting Technology="Surface Mount", Number of Channels=1, PackageDescription="5-Pin Plastic Small Outline, Body 1.6 x 2.9 mm, Pitch 0.95 mm", PackageReference=DBV0005A, PackageVersion="4073253-4/K, 03/2006", PartNumber=OPA820IDBVR, Settling Time (0.1%)(Typ)(ns)=26, Slew Rate(Typ)(V/us)=240, Sub Family="High Output Current Amplifier (>=50mA), High Speed Amplifier (>=50MHz)", THD (Fc is 1 MHz)(Typ)(dB)=-85, Vio(Max)(mV)=1, Vn at Flatband(Typ)(nV/rtHz)=2.5, Vs(Max)(V)=12, Vs(Min)(V)=5
U2: library part CMP-0065-00037-3, "Switched Capacitor Voltage Converter, 8-pin Narrow SOIC, Pb-Free", Manufacturer="Texas Instruments", PackageTopMarking=NSZXTT*LM26*63M, PowerWise=N, Code_IPC=SOIC127P600-8, Code_JEDEC=MS-012-AA, ComponentLink1Description="Datasheet URL", ComponentLink1URL=http://www.ti.com/general/docs/lit/getliterature.tsp?genericPartNumber=LM2663&fileType=pdf, CompType="Switch Caps", PackageDescription="SOIC Narrow, 4.9 x 3.9 x 1.45mm, 8 Lead, 1.27mm Pitch", PackageReference=D0008A, PinCount=8, RoHS=Y
U2A U2B: library part CMP-09116-000024-1, "IC OPAMP GP 1 CIRCUIT TSOT23-5", Input Bias Current=0.002uA, Input Offset Voltage=0.075mV, Manufacturer="Analog Devices", Manufacturer Part Number=LT6015MPS5#TRMPBF, Max Junction Temp=+150°C, Max Supply Voltage=50V, Min Supply Voltage=3V, Nominal Supply Current=315-340uA, Output Current per Channel=32mA, Package=S5-5-05-08-1635, Temperature="-55°C to +150°C", Temperature Range Low=-55°C, Voltage Gain=3000V/mV, Automotive=No, Category=IC, ComponentLink2Description=Datasheet, ComponentLink2URL=https://www.analog.com/media/en/technical-documentation/data-sheets/601567ff.pdf, Device Class L1="Integrated Circuits (ICs)", Device Class L2="Linear ICs", Device Class L3="Amplifiers - Op Amps", Digikey Description="IC OPAMP GP 1 CIRCUIT TSOT23-5", Gain Bandwidth=3.3MHz, Height=1mm, Ipc Land Pattern Name=SOT95P280X100-5, Lead Free=Yes, Mouser Description="LT6015 - 3.2MHz, 0.8V/µs Low Power, Over-The-Top Precision Op Amps", Number of Channels=1, Octopart=https://octopart.com/lt6015mps5%23trmpbf-analog+devices-88316455, RoHS=TRUE, Standoff Height=0.01mm, Temperature Range High=+150°C
U2C: library part CMP-00370-145533195-1, "OPA863ADBVR Single-channel, high-precision, low-power, 105-MHz, 12-V RRIO voltage-feedback amplifier 5-SOT-23 -40 to 125", Ambient Temperature Range High=125°C, Case/Package=SOT-23, Input Bias Current=300nA, Input Offset Voltage (Vos)=10µV, Manufacturer Lifecycle Status=ACTIVE, Max Junction Temperature (Tj)=150°C, Max Supply Voltage=12.6V, Min Operating Temperature=-40°C, Min Supply Voltage=2.7V, Nominal Supply Current=800µA, Output Current per Channel=30mA, Voltage Gain=128dB, Bandwidth=105MHz, Height=1.45mm, Length=2.9mm, Lifecycle Status=Production, Max Operating Temperature=125°C, NexarPartId=145533195, Number of Channels=1, Number of Pins=5, Response Time=70ns, Thickness=1.2mm, Width=1.6mm
U3: library part CMP-00370-106221449-1, "TPS7A2425DBVR 200-mA, 18-V, ultra-low-IQ, low-dropout (LDO) voltage regulator with enable ; 5-SOT-23 -40 to 125", Case/Package=SOT-23, Dropout Voltage=160mV, Manufacturer Lifecycle Status=ACTIVE, Max Junction Temperature (Tj)=125°C, Max Supply Voltage=18V, Min Operating Temperature=-40°C, Min Supply Voltage=3V, Output Current=200mA, Output Voltage=2.5V, Accuracy=1.25%, Height=1.45mm, Length=2.9mm, Lifecycle Status=Production, Max Operating Temperature=125°C, NexarPartId=106221449, Number of Channels=1, Number of Outputs=1, Number of Pins=5, Thickness=1.2mm, Width=1.6mm
U4: library part CMP-0394-00292-2, "Single Output High PSRR LDO, 200 mA, Fixed -2.5 V Output, -10 to -2.7 V Input, 5-pin SOT-23 (DBV), -40 to 125 degC, Green (RoHS & no Sb/Br)", Manufacturer="Texas Instruments", Accuracy(%)=2, Code_JEDEC=MO-178, ComponentLink1Description="Manufacturer URL", ComponentLink1URL=http://www.ti.com/, ComponentLink2Description=Datasheet, ComponentLink2URL=http://www.ti.com/general/docs/lit/getliterature.tsp?genericPartNumber=TPS72325&fileType=pdf, ComponentLink3Description="Package Specification", ComponentLink3URL=http://www.ti.com/litv/pdf/mpds018i, DatasheetVersion=SLVS346B, Eco-Plan="Green (RoHS & no Sb/Br)", Fixed Output Options(V)=-2.5, Iout(Max)(A)=0.2, Iq(Typ)(mA)=0.13, Mounting Technology="Surface Mount", PackageDescription="5-Pin Plastic Small Outline, Body 1.60 Ãƒâ€” 2.90 mm, Pitch 0.95 mm", PackageReference=DBV0005A, PackageVersion=4073253-4/K, PartNumber=TPS72325DBVR, SubFamily="Single Channel LDO", Vdo(Typ)(mV)=280, Vin(Max)(V)=-2.7, Vin(Min)(V)=-10, Vout Adj(Max)(V)=-2.5, Vout Adj(Min)(V)=-2.5
U5: library part CMP-00370-106221451-1, "TPS7A2433DBVR 200-mA, 18-V, ultra-low-IQ, low-dropout (LDO) voltage regulator with enable ; 5-SOT-23 -40 to 125", Case/Package=SOT-23, Manufacturer Lifecycle Status=ACTIVE, Output Voltage=3.3V, Height=1.45mm, Length=2.9mm, Lifecycle Status=Production, NexarPartId=106221451, Number of Channels=1, Number of Pins=5, Thickness=1.2mm, Width=1.6mm

## Free pads (board coordinates)
  round 5 hole 2.4: 3(46,4) 3(46,50.6) 3(81,4) 3(81,50.6)

## Via types
v1: diameter 0.6, hole 0.3, Top Layer to Bottom Layer, 135 vias
v2: diameter 1.27, hole 0.711, Top Layer to Bottom Layer, 3 vias
v3: diameter 1.778, hole 0.762, Top Layer to Bottom Layer, 2 vias
v4: diameter 2.032, hole 1.016, Top Layer to Bottom Layer, 1 vias

## Nets (pads, with @x,y where several pads share a name; then routed paths per layer and width w, separated by ;. In a path a pad name is that pad's centre, name@x,y a point inside that pad or via, vN(x,y) a via of type N, cw(c..) or ccw(c..) an arc to the next point about the centre after c; other vN are vias at no path point)
+2.5V: C6.2 U3.5 | length 2
  Top Layer w0.5: U3.5 C6.2
+3.3V: C15.2 U5.5 | length 1.9
  Top Layer w0.5: C15.2 U5.5
+5V: ADC.1 C1A.1 C1C.1 C1F.1 C1G.1 C2A.1 C2B.1 C2C.1 C2F.1 C2G.1 C3A.1 C3B.1 C3C.1 C4.2 C4A.1 C4C.1 C5.2 C7B.1 C8B.1 C9B.2 C10.2 C10A.1 C11A.1 C14.2 R1C.2 R1C.3 R2B.1 R2B.2 R6B.1 R6B.2 R9B.1 U1.2 U1.4 U1A.1 U1A.11 U1B.5 U1C.15 U1G.5 U2.8 U2A.5 U2B.5 U2C.5 U3.1 U3.3 U5.1 U5.3 | length 326.5
  Top Layer w0.25: C3A.1 U1A.11 ; U1A.1 48.15,36.954 C1A.1 ; U1C.15 52.589,12.621 v1(52.877,12.333)
  Top Layer w0.4: C3A.1 C4A.1 47.65,27.725 47.932,27.443 55.412,27.443 55.716,27.139 55.716,26.137 U2A.5 ; C10A.1 U2A.5 ; v1(57.538,26.133) U2A.5
  Top Layer w0.5: U1.2 U1.4 C4.2 ; ADC.1 12.651,7.103 12.651,6.379 12.827,6.203 C1F.1 C2F.1 16.357,6.2 v2@24.497,6.2 ; C10.2@15.64,47.938 U2.8 12.645,45.329 12.47,45.153 C4.2 ; C10.2 U5.3 35.439,50.118 35.614,50.294 C14.2 U5.1 43.87,47.982 48.15,43.701 ; R1C.2@24.5,22.5 R1C.3@27.04,22.5 ; R1C.2@24.505,22.5 24.505,31.651 U3.3 25.454,34.179 25.805,34.53 25.805,35.727 25.454,36.079 U3.1 C5.2 C4.2 ; R1C.3 27.072,22.463 27.072,14.058 C4C.1 C3C.1 29.683,14.023 29.683,12.14 U2C.5 U2C.5@29.68,12.132 ; C1A.1 C2A.1 48.15,43.701 ; v1(55.5,12.333) v1(57.4,12.333) ; C8B.1 C7B.1 U2B.5 60.158,52.033 59.982,52.208 54.117,52.208 R6B.1 R6B.2 48.15,43.701 ; C9B.2 v2(70.605,23.295) ; R2B.2 R2B.1 C3B.1 C2B.1 U1B.5 70.605,23.332 70.641,23.295 C1G.1 U1G.5@80.106,24.821 ; U1G.5 C2G.1
  Bottom Layer w0.5: v2(24.497,6.227) v2@24.5,6.227 ; v2@24.5,6.197 v2@24.5,6.227 ; R1C.2 v2@24.5,6.227 ; v1(57.4,12.333) v1(55.5,12.333) v1(52.877,12.333) 52.877,7.109 52.875,7.106 ; v1(57.538,26.133) 57.538,23.588 57.83,23.295 v2@70.641,23.295 ; v2(70.605,23.295) 70.605,7.399 70.312,7.106 52.875,7.106 ; v2@24.5,6.227 38.943,6.227 39.822,7.106 52.875,7.106
-2.5V: C8.2 J1.3 U4.5 | length 26.1
  Top Layer w0.5: U4.5@27.636,45.382 C8.2 30.52,24.727 30.752,24.494 J1.3
-5V: C7.2 C12.2 C13.2 J1.1 U2.5 U4.2 U4.3 | length 52.9
  Top Layer w0.5: U2.5 C12.2 ; C13.2 C12.2 ; U4.2 U4.3 C7.2 ; J1.1 38.08,20.689 37.787,20.396 29.434,20.396 29.141,20.689 29.141,40.125 27.747,41.519 C7.2 ; C12.2 C7.2
ADC_IN: ADC.3 J11.1 | length 5.3
  Top Layer w0.3: ADC.3 15.402,9.033 J11.1
CS_PD: ADC.6 P9.37 | length 5.9
  Top Layer w0.3: ADC.6 10.22,3.036 P9.37
GAIN_OUT: J11.3 R6C.1 U2C.1 | length 11.1
  Top Layer w0.3: J11.3@19.738,10.621 20.992,9.367 28.4,9.367 ; R6C.1@27.855,9.355 29.535,9.355 29.685,9.505 U2C.1
GND: 5V.1 ADC.2 C1.2 C1A.2 C1C.2 C1E.2 C1F.2 C1G.2 C2.2 C2A.2 C2B.2 C2C.2 C2F.2 C2G.2 C3.1 C3A.2 C3B.2 C3C.2 C4.1 C4A.2 C4B.1 C4C.2 C5.1 C5A.1 C5C.1 C6.1 C6A.2 C6B.1 C7.1 C7A.2 C7B.2 C8.1 C8A.1 C8B.2 C8C.1 C9.1 C9B.1 C10.1 C10A.2 C11A.2 C12.1 C13.1 C14.1 C15.1 GND.1 J0.2 J0.3 P9.23 P9.24 P9.25 P9.26 R1D.2 R2C.2 R2D.2 R3B.2 R5A.3 R7B.2 R7C.2 R9C.1 R10B.2 R10C.1 U1.1 U1A.17 U1B.2 U1C.5 U1C.17 U1G.2 U1G.3 U2.1 U2.3 U2.6 U2A.2 U2B.2 U2C.2 U3.2 U4.1 U5.2
  other v1: 36.334,8.159 39.024,8.159 23.337,8.416 25.692,8.416 75.5,9.6 78.2,9.6 80.9,9.6 12.618,10.259 14.173,10.259 23.337,10.409 25.692,10.409 40.7,10.958 80.9,12.3 60,12.399 62,12.399 64,12.399 42.527,12.427 36.336,13.539 39.024,13.539 49.871,13.894 47.5,13.931 40.7,14.123 52.339,14.999 58,14.999 60,14.999 62,14.999 64,14.999 80.9,15 42.527,15.974 45,15.974 47.5,15.961 49.871,15.974 15.925,16.294 60,17.599 62,17.599 64,17.599 80.9,17.7 15.925,18.285 18.439,19.837 39.915,20.162 41.315,20.162 42.715,20.162 44.115,20.162 45.515,20.162 46.915,20.162 48.315,20.162 49.715,20.162 51.168,20.162 52.568,20.161 53.968,20.161 55.368,20.161 56.768,20.161 58.168,20.161 59.568,20.161 60.968,20.161 75.5,20.4 78.2,20.4 80.9,20.4 62.2,20.822 39.915,21.787 41.315,21.787 51.172,21.787 52.572,21.787 53.972,21.787 55.372,21.787 56.772,21.787 58.172,21.787 62.2,22.447 39.915,23.487 41.315,23.487 62.2,24.147 39.915,25.112 41.315,25.112 60.213,25.283 62.2,25.847 39.915,26.812 41.315,26.812 60.213,26.908 62.2,27.472 39.915,28.437 41.315,28.437 62.2,29.173 39.915,30.137 41.315,30.137 56.6,30.873 58,30.873 59.4,30.873 60.8,30.873 62.2,30.873 41.315,31.762 56.6,32.498 39.915,33.462 56.6,34.123 50.571,34.741 51.971,34.741 47.4,35.329 56.6,35.823 50.571,36.366 51.971,36.366 56.6,37.448 41.595,37.843 42.995,37.843 44.395,37.843 45.795,37.843 47.195,37.843 56.6,39.148 76.177,39.811 77.577,39.811 76.177,41.436 77.577,41.436 76.177,43.136 77.577,43.136 76.177,44.761 77.577,44.761 69.589,45.165 71.589,45.165 76.177,46.461 77.577,46.461 66.324,48.086 67.724,48.086 76.177,48.086 77.577,48.086 66.324,49.786 67.724,49.786 69.124,49.786 70.524,49.786 71.924,49.786 73.324,49.786 74.724,49.786 76.177,49.786 77.577,49.786
  other v2: 33,50.049
  other v4: 35.54,21.954
HPF_IN1: C1D.1 J10.1 | length 2.9
  Top Layer w0.3: C1D.1 J10.1
HPF_IN2: C3D.1 J10.3 | length 2.9
  Top Layer w0.3: J10.3 C3D.1
HPF_OUT1: C1D.2 J10.2 R1D.1 | length 5.6
  Top Layer w0.3: R1D.1 C1D.2 77.044,12.789 J10.2
HPF_OUT2: C3D.2 J10.4 R2D.1 | length 5.6
  Top Layer w0.3: R2D.1 C3D.2 77.044,17.209 J10.4
LNA_OUT: J3.3 R4B.1 | length 3.2
  Top Layer w0.3: R4B.1 J3.3
LPF_IN: J11.4 R1E.2 | length 3.3
  Top Layer w0.3: J11.4 R1E.2
LPF_OUT: C1E.1 J11.2 R1E.1 | length 7.5
  Top Layer w0.3: J11.2 C1E.1 R1E.1
MISO_PD: ADC.5 P9.40 | length 4.9
  Top Layer w0.3: P9.40 8.95,4.317 8.95,7.908 9.126,8.083 ADC.5
MODE: R9C.2 U1C.6 | length 2.8
  Top Layer w0.25: U1C.6 52.589,17.872 53.451,18.734 R9C.2
MOSI_PD: ADC.4 P9.42 | length 8.4
  Top Layer w0.3: P9.42 6.409,4.316 6.409,8.858 6.585,9.033 ADC.4
NetC1B_1: C1B.1 PD2.2 Q1B.3 R1B.2 U1B.4 | length 20.8
  Top Layer w0.3: Q1B.3 62.815,38.865 62.991,38.689 68.717,38.689 ; PD2.2 U1B.4 68.705,38.677 68.717,38.689 ; C1B.1 R1B.2 72.205,38.865 72.029,38.689 68.717,38.689
NetC1B_2: C1B.2 R1B.1 R4B.2 R5B.1 U1B.1 | length 32
  Top Layer w0.3: R5B.1 70.629,48.98 ; U1B.1 C1B.2 70.605,48.956 70.629,48.98 ; R4B.2 76.881,48.804 76.705,48.98 70.629,48.98
NetC4B_2: C4B.2 R2B.3 R3B.1 U1B.3 | length 8
  Top Layer w0.3: U1B.3 C4B.2 R3B.1 68.705,45.517 69.338,46.15 R2B.3
NetC5A_2: C5A.2 J1.2 R2A.2 | length 4.2
  Top Layer w0.5: J1.2 C5A.2 R2A.2
NetC5B_1: C5B.1 R8B.2 U2B.1 | length 11.1
  Top Layer w0.3: U2B.1 57.562,50.856 58.672,50.856 58.848,50.68 58.848,47.272 59.023,47.096 C5B.1 R8B.2
NetC5B_2: C5B.2 R5B.2 U2B.4 | length 5.5
  Top Layer w0.3: U2B.4 R5B.2 C5B.2
NetC5C_2: C5C.2 R1C.1 R2C.1 R3C.2 | length 17.6
  Top Layer w0.3: R3C.2 18.454,11.402 19.14,12.087 21.146,12.087 21.96,12.902 R1C.1
NetC6A_1: C6A.1 U1A.12 | length 2.8
  Top Layer w0.25: U1A.12 48.15,33.372 49.703,31.819 C6A.1
NetC6B_2: C6B.2 R6B.3 R7B.1 U2B.3 | length 9.3
  Top Layer w0.3: R6B.3 C6B.2 ; R7B.1 U2B.3
NetC6C_1: C6C.1 J12.2 | length 5.1
  Top Layer w0.3: C6C.1 J12.2
NetC6C_2: C6C.2 R8C.1 U1C.4 | length 5.8
  Top Layer w0.25: U1C.4 56.45,15.749 R8C.1 58.805,15.799 59.2,16.194 C6C.2
NetC7A_1: C7A.1 R3A.2 U2A.3 | length 5
  Top Layer w0.3: C7A.1 R3A.2 U2A.3
NetC7C_1: C7C.1 J12.1 | length 5.1
  Top Layer w0.3: C7C.1 J12.1
NetC7C_2: C7C.2 R8C.2 U1C.1 | length 5.8
  Top Layer w0.25: U1C.1 56.45,14.249 R8C.2 58.805,14.199 59.2,13.804 C7C.2
NetC8A_2: C8A.2 R4A.2 U1A.6 | length 10.9
  Top Layer w0.25: C8A.2 44.45,35.432 44.596,35.579 U1A.6
  Top Layer w0.3: R4A.2 C8A.2
NetC8C_2: C8C.2 U1C.7 U1C.8 | length 4.7
  Top Layer w0.25: U1C.8 51.589,18.159 C8C.2@51.839,18.409 ; C8C.2 C8C.2@51.839,18.409 ; U1C.7 52.089,18.159 C8C.2@51.839,18.409
NetC9_2: C9.2 U4.4 | length 1.5
  Top Layer w0.3: U4.4 C9.2
NetC9A_1: C9A.1 R6A.1 U2A.1 | length 8.3
  Top Layer w0.3: U2A.1 R6A.1 C9A.1
NetC9A_2: C9A.2 R4A.1 R5A.1 R5A.2 U2A.4 | length 24.8
  Top Layer w0.3: U2A.4 R4A.1 R5A.2 R5A.1 C9A.2
NetC11_1: C11.1 U2.2 | length 4.9
  Top Layer w0.3: C11.1 U2.2
NetC11_2: C11.2 U2.4 | length 6.6
  Top Layer w0.3: C11.2 9.999,39.659 10.175,39.835 U2.4@10.175,41.519
NetJ2_1: J2.1 R1A.1 | length 2.7
  Top Layer w0.3: R1A.1 J2.1
NetJ3_1: J3.1 R2G.2 U1G.1 | length 5.8
  Top Layer w0.3: R2G.2 77.518,30.732 J3.1 U1G.1@80.106,27.571
NetJ3_2: J3.2 R1G.1 | length 2.6
  Top Layer w0.3: R1G.1 J3.2
NetJ12_3: J12.3 R7C.1 | length 3.9
  Top Layer w0.3: R7C.1 J12.3
NetPD1_1: PD1.1 R6A.2 U1A.5 | length 48.4
  Top Layer w0.25: PD1.1 U1A.5
  Top Layer w0.3: PD1.1 40.62,21.112 40.766,20.966 60.624,20.966 61.01,21.351 R6A.2
NetPD1_2: PD1.2 R2A.1 | length 8.4
  Top Layer w0.5: R2A.1 PD1.2 v3(38.08,36.079)
NetPD2_1: PD2.1 R9B.2 | length 6.3
  Top Layer w0.5: R9B.2 v3(68.705,31.233)
NetQ1B_1: Q1B.1 R8B.1 | length 1.9
  Top Layer w0.3: Q1B.1 R8B.1
NetQ1B_2: Q1B.2 R10B.1 | length 2.7
  Top Layer w0.3: R10B.1 Q1B.2
NetR1A_2: R1A.2 R3A.1 U1A.15 | length 7.2
  Top Layer w0.25: U1A.15 R1A.2
  Top Layer w0.3: R3A.1 R1A.2
NetR1G_2: R1G.2 R2G.1 U1G.4 | length 10.4
  Top Layer w0.3: R1G.2 R2G.1 75.896,25.301 76.071,25.125 U1G.4
NetR3C_1: R3C.1 R4C.1 U2C.3 | length 15.8
  Top Layer w0.3: R3C.1@19.878,7.324 R3C.1 31.41,7.5 31.585,7.676 U2C.3 33.612,9.537 R4C.1 ; R4C.1@33.655,9.666 R4C.1@33.662,9.673
NetR5C_1: R5C.1 R6C.2 U2C.4 | length 6.5
  Top Layer w0.3: R6C.2 30.652,10.955 U2C.4@31.435,11.737 ; U2C.4@31.435,11.737 31.585,11.887 U2C.4 33.636,12.137 R5C.1
OFSN: C9C.1 U1C.14 | length 2.7
  Top Layer w0.25: C9C.1 52.089,10.946 U1C.14
  Top Layer w0.3: C9C.1@52.077,10.934 C9C.1
OUT2_N: DIFF.1 R5C.2 U1C.10 | length 19.6
  Top Layer w0.25: R5C.2 35.307,12.119 35.307,11.272 35.453,11.125 36.437,11.125 36.463,11.099 37.01,11.099 37.174,11.262 37.174,11.613 DIFF.1 38.184,11.613 38.184,11.262 38.348,11.099 39.002,11.099 42.859,14.956 43.152,15.249 U1C.10
OUT2_P: DIFF.2 R4C.2 U1C.11 | length 19.9
  Top Layer w0.25: R4C.2 35.307,9.632 35.307,10.479 35.453,10.625 36.23,10.625 36.256,10.599 37.245,10.599 37.421,10.422 37.421,9.837 DIFF.2 37.938,9.837 37.938,10.422 38.114,10.599 39.209,10.599 43.359,14.749 U1C.11
PS_ON: P9.44
VAGC: R10C.2 U1C.13 | length 5.2
  Top Layer w0.25: R10C.2 49.943,11 51.589,12.646 U1C.13
VCC: 5V.2 C1.1 C2.1 C3.2 J0.1 U1.3 | length 23.7
  Top Layer w0.3: U1.3@7.629,30.991 U1.3@7.65,30.971
  Top Layer w0.5: U1.3 7.632,25.256 C2.1 14.034,25.187 14.04,25.193 ; J0.1 14.04,25.193 ; 5V.2 14.04,25.193
VREF: C9C.2 R10C.3 U1C.16 | length 13.5
  Top Layer w0.25: U1C.16 53.089,13.373 53.682,12.78 C9C.2
  Top Layer w0.3: R10C.3 53.506,8.46 53.682,8.636 C9C.2
pads on no net: P8.23 P8.24 P8.25 P8.26 P8.27 P8.28 P8.29 P8.30 P8.31 P8.32 P8.33 P8.34 P8.35 P8.36 P8.37 P8.38 P8.39 P8.40 P8.41 P8.42 P8.43 P8.44 P8.45 P8.46 P9.27 P9.28 P9.29 P9.30 P9.31 P9.32 P9.33 P9.34 P9.35 P9.36 P9.38 P9.39 P9.41 P9.43 P9.45 P9.46 U1A.2 U1A.3 U1A.4 U1A.7 U1A.8 U1A.9 U1A.10 U1A.13 U1A.14 U1A.16 U1C.2 U1C.3 U1C.9 U1C.12 U2.7 U3.4 U5.4

## Polygon pours and split planes (outlines as drawn)
GND on Bottom Layer "GND_L02_P013" (solid, pour order 13): 0.5,0.5 0.5,54.1 84.5,54.1 84.5,0.5
GND on Top Layer "GND_L01_P014" (solid, pour order 14): 0.5,0.5 0.5,54.1 84.5,54.1 84.5,0.5

## Other copper
Multi-Layer:
  pour cut-out: 70.055,39.213 70.055,38.189 62.265,38.189 62.265,39.213
  pour cut-out: 36.306,34.865 36.306,25.804 33.38,25.804 33.38,34.865
  pour cut-out: 55.239,41.182 55.239,32.869 52.399,32.869 52.399,41.182
  pour cut-out: 52.825,35.864 52.825,35.296 48.3,35.296 48.3,35.864
  pour cut-out: 46.5,36.359 46.5,35.798 41.975,35.798 41.975,36.359
  pour cut-out: 63.365,40.874 63.365,39.213 62.265,39.213 62.265,40.874
  pour cut-out: 69.744,39.213 69.744,24.345 67.666,24.345 67.666,39.213
  pour cut-out: 42.78,37.197 42.78,34.865 33.38,34.865 33.38,37.197
  pour cut-out: 72.755,44.407 72.755,38.189 70.055,38.189 70.055,44.407

## Silkscreen, mask and mechanical layers (free items; w line width, h text height)
Top Overlay:
  text "GND" at 32.325,50.881 h0.5
  text "-2.5V" at 26.466,46.392 h0.5
  text "+3.3V" at 36.2,42.063 h0.5
  text "LNA_OUT" at 52.225,41.638 h0.5
  text "-5V" at 14.91,40.204 h0.5
  text "LNA_OUT" at 81.935,37.479 h0.5 r270
  text "+2.5V" at 28.211,37.173 h0.5 r270
  text "+5V" at 7.433,35.83 h0.5
  text "A" at 63.4,34.183 h0.8 r270
  text "INV_IN" at 81.7,33 h0.5
  text "INV_OUT" at 81.935,32.203 h0.5 r270
  text "A" at 35.28,30.936 h0.8
  text "K" at 40.445,30.936 h0.8
  text "K" at 63.4,29 h0.8 r270
  text "V_COM_MODE" at 24.436,25.405 h0.5
  text "+5V" at 71.594,23.045 h0.5
  text "-2.5V" at 31.674,22.076 h0.5
  text "-5V" at 37.186,22.076 h0.5
  text "GND" at 34.88,19.817 h0.5
  text "SINGLE" at 67.806,18.937 h0.5
  text "ENDED" at 67.806,18.182 h0.5
  text "HPF_OUT_2" at 70,17.036 h0.5
  text "AGG_IN_N" at 67.806,16.1 h0.5
  text "HPF_IN_2" at 80.388,16.047 h0.5
  text "LPF_OUT" at 15.248,15.165 h0.5
  text "LPF_IN" at 18.993,15.165 h0.5
  text "AGC_IN_P" at 67.806,13.5 h0.5
  text "HPF_IN_1" at 80.388,13.35 h0.5
  text "HPF_OUT_1" at 70,12.536 h0.5
  text "ADC_IN" at 15.461,8.65 h0.5
  text "GAIN_OUT" at 18.7,8.65 h0.5
  text "AGC_SET" at 45.588,6.841 h0.5
  text "+5V" at 25.425,5.938 h0.5
  text "GND" at 30.634,4.953 h0.5 r270
  text "OpenVLC_RX_2.5_B" at 57.641,4.426 h0.8
  text "IMDEA Networks" at 57.641,2.995 h0.8
  text "DC-coupling with current cancellation" at 49.5,1.602 h0.8
Bottom Overlay:
  text "GND" at 12.21,32.4 h0.5 r270
Mechanical 1:
  the board outline again, w0.254

## Text inside footprints (layer, text, board x,y; h text height)
C2: Top Overlay "+" at 9.486,24.673 h1.2
C11: Top Overlay "+" at 5.846,45.845 h1.2 r90
C12: Top Overlay "+" at 20.731,47.705 h1.2 r90